# Altium PCB PCB1.PcbDoc
Units mil, origin at the board's own origin, x right, y up, seen from the top; angles counter-clockwise.
Board outline 6080 x 5395 mil, 2 copper layers (Top Layer, Bottom Layer); 29 components, 27 nets, 167 pads, 12 vias.
Unrouted connection lines stored in the file: 19.
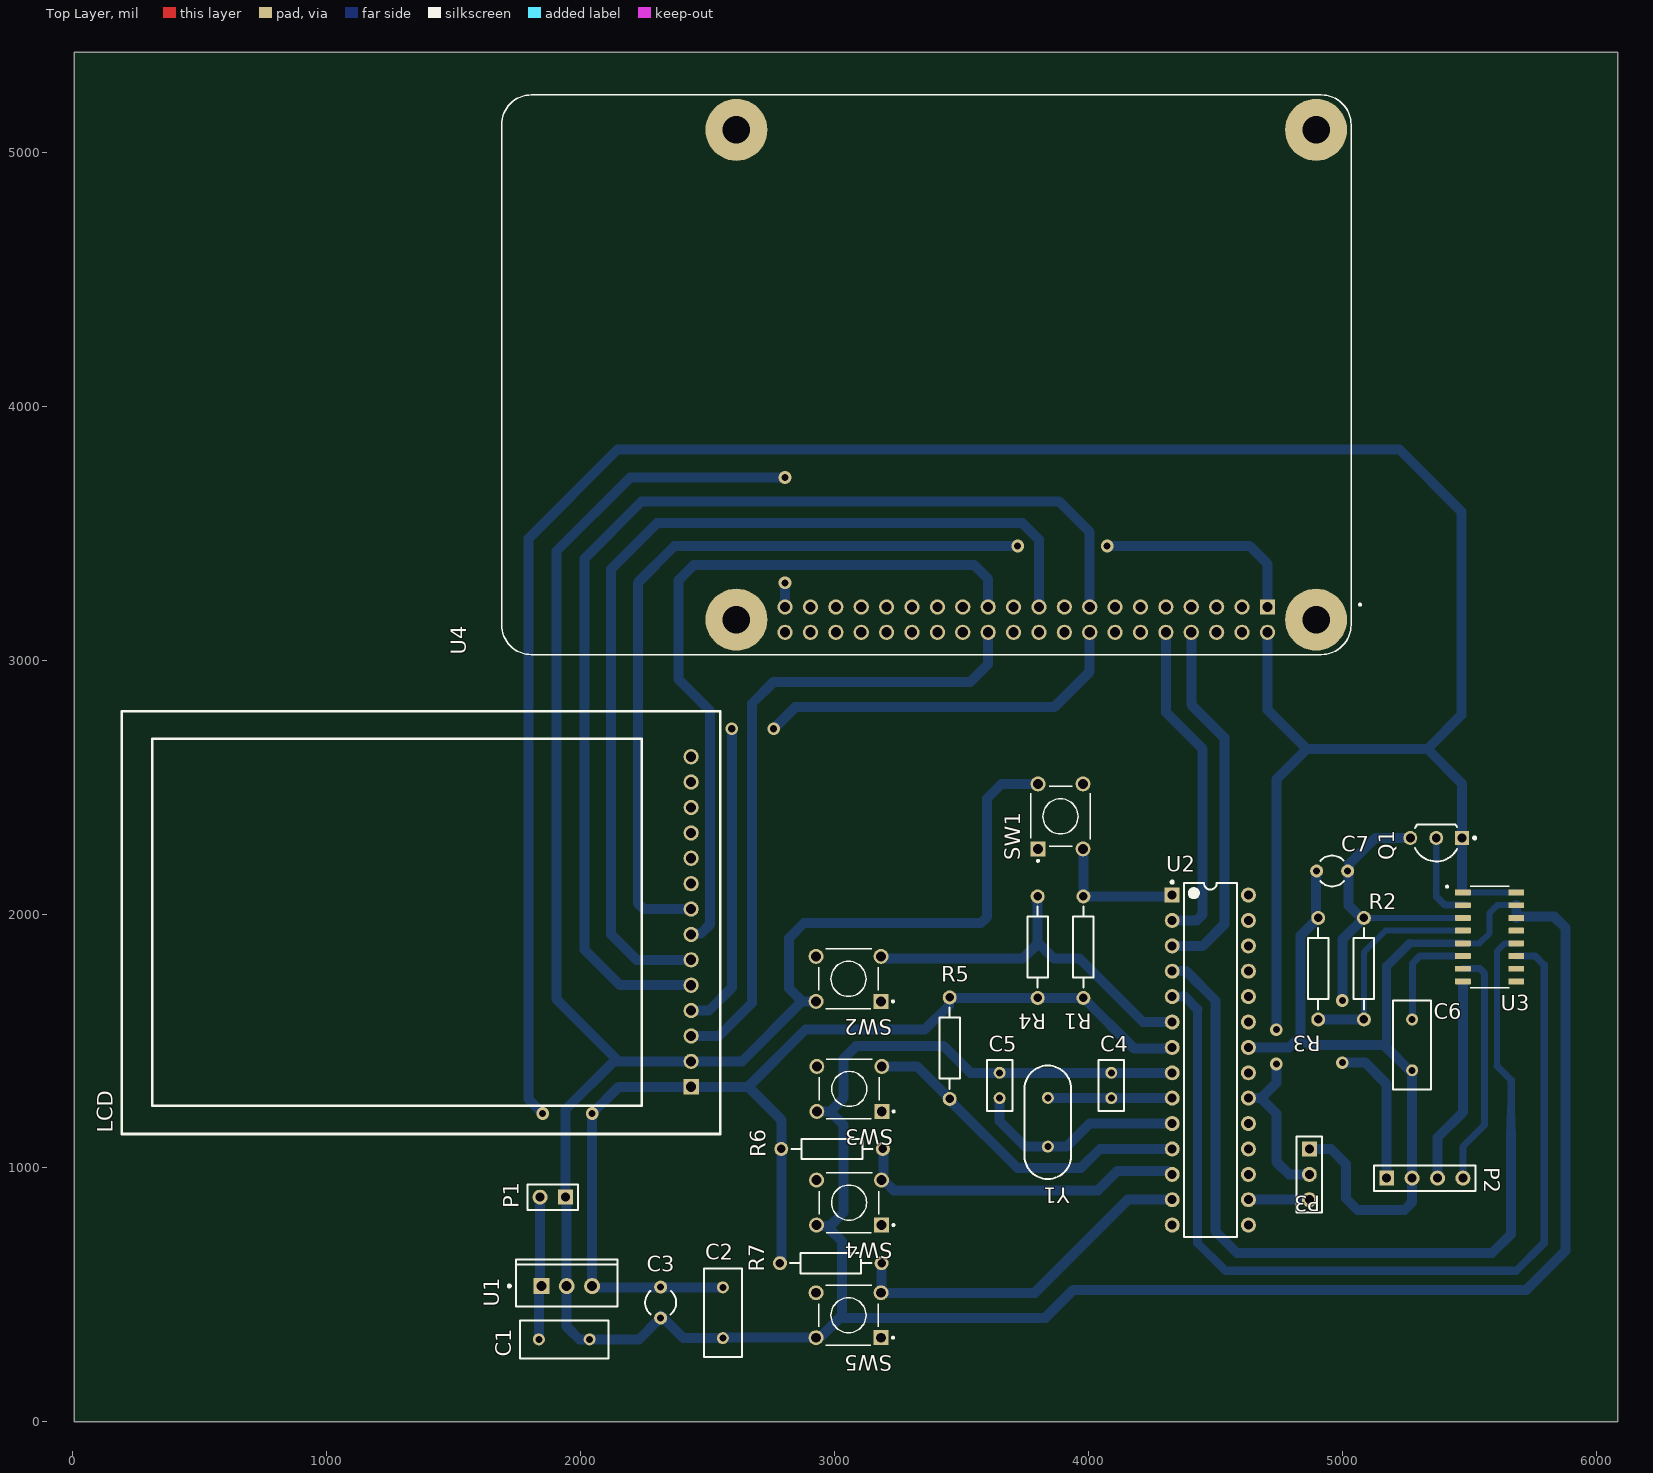
[diagram p0: Top Layer view]
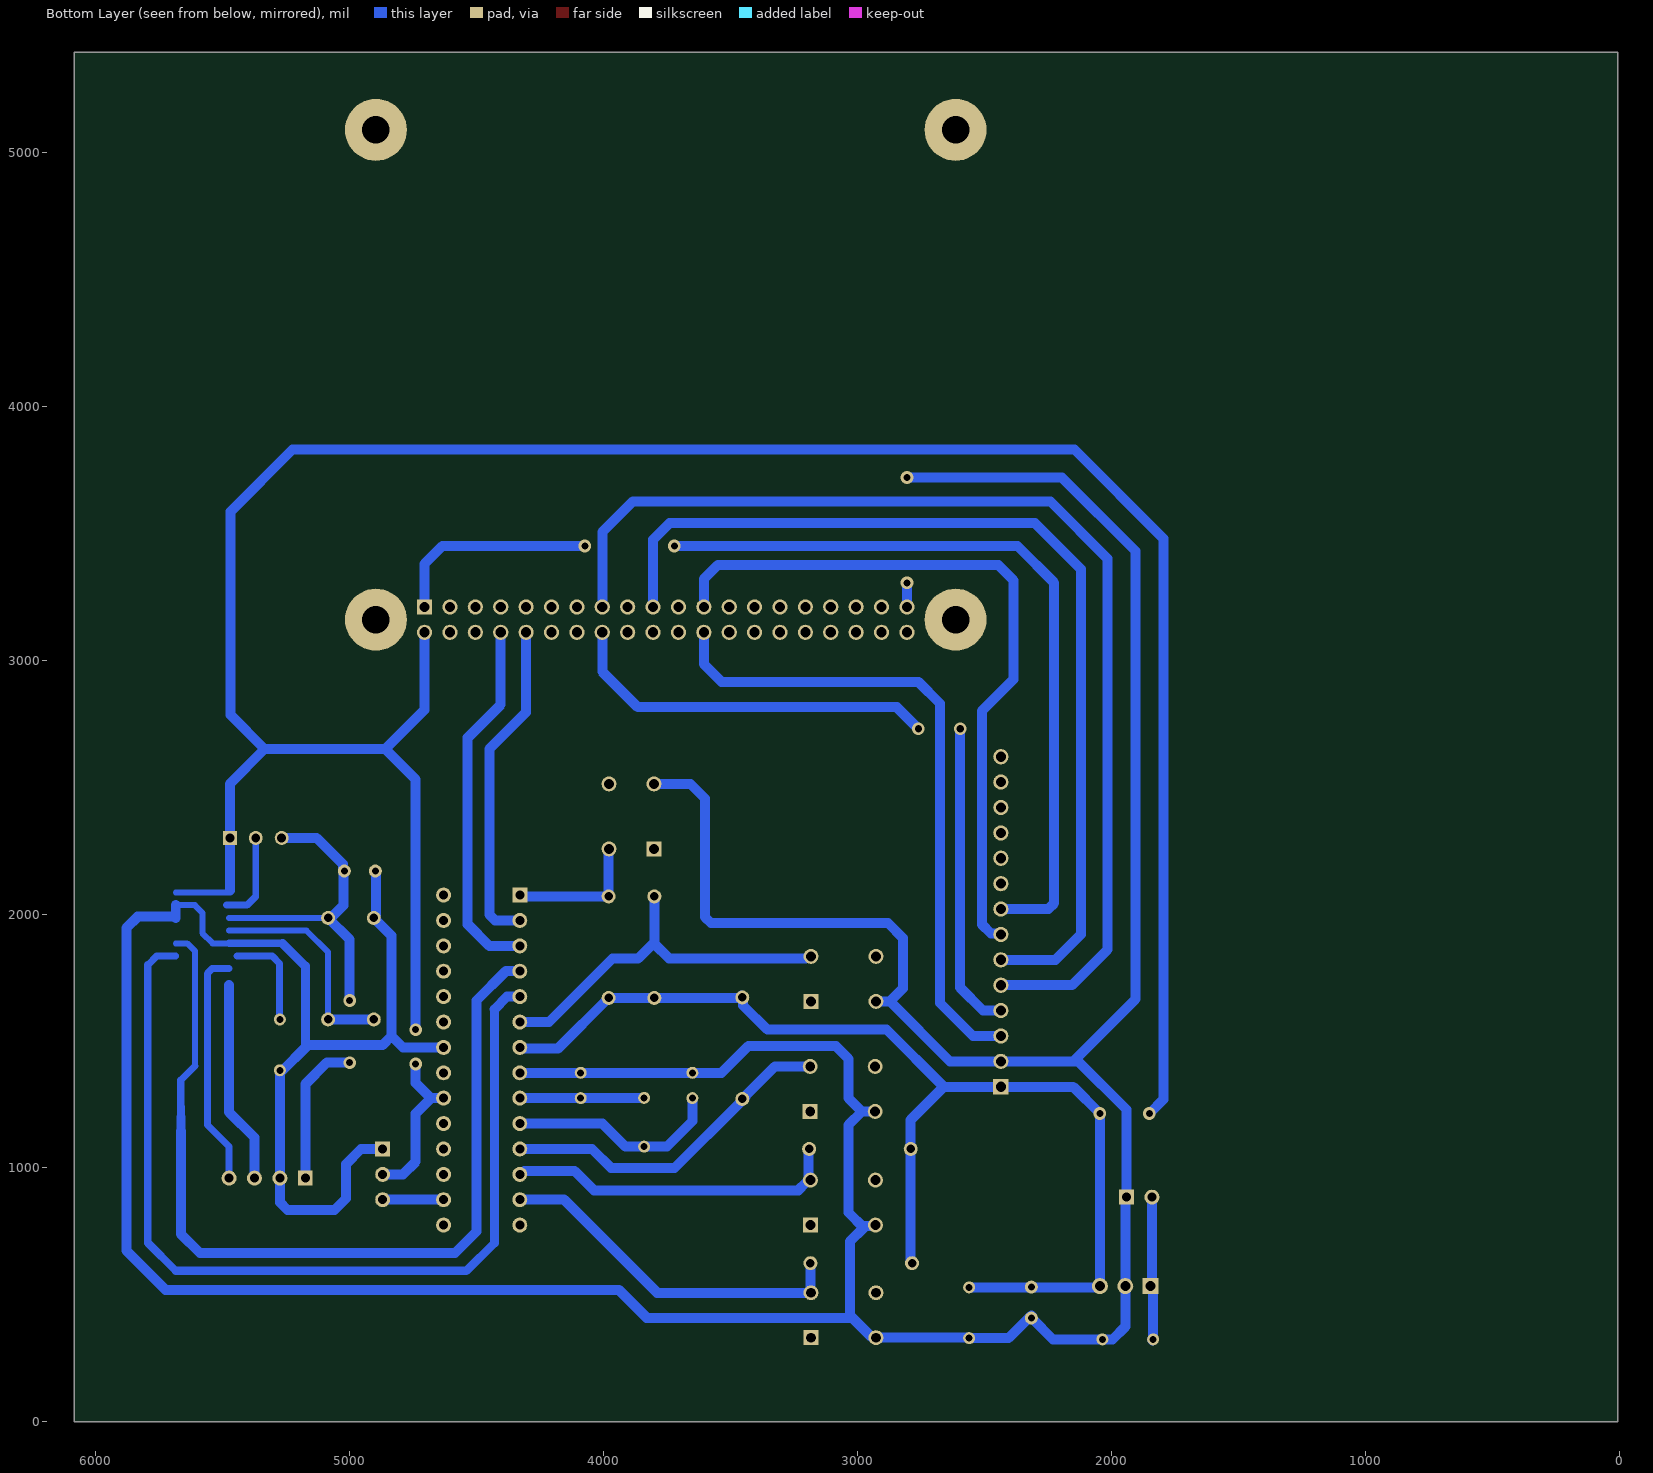
[diagram p1: Bottom Layer view, seen from below]

## Layer stack, top to bottom
Top Solder: solder mask 0.4, Solder Resist, Dk 3.5
Top Layer: signal copper 1.4
Dielectric 1: dielectric 12.6, FR-4, Dk 4.8
Bottom Layer: signal copper 1.4
Bottom Solder: solder mask 0.4, Solder Resist, Dk 3.5

## Board outline
5,0 6085,0 6085,5395 5,5395

## Design rules (kind name [scope] priority, off if disabled: settings)
Clearance [All] p1: gap=10 ignorepadtopadclearanceinfootprint=FALSE except(0: Arc-Hole Track-Hole SMDPad-Hole THPad-Hole Via-Hole Fill-Hole Poly-Hole Region-Hole Text-Hole)
PolygonConnect [All] p1: connectstyle=Relief reliefconductorwidth=10 reliefentries=4 polygonreliefangle="90 Angle" airgapwidth=10
RoutingVias [All] p1: holewidth=28 width=50 viastyle="Through Hole" minholewidth=28 minwidth=50 maxholewidth=28 maxwidth=50
SolderMaskExpansion [All] p1: expansion=4 istentingtop=FALSE
Width [All] p1: maxlimit=47.24 minlimit=23.62 preferedwidth=39.37 minimp=50.000000 maximp=50.000000 favimp=50.000000
30 further rules are at their usual default settings.

## Classes and differential pairs
component class Sheet2: DIS?

## Components (designator, comment, footprint, x,y, rotation, side; value= is the part's Value field where it differs from the comment)
C1 "Cap" RAD-0.2 1935,325 r180 top value=100nF
C2 "Cap" RAD-0.2 2560,430 r90 top value=100nF
C3 "Cap2" R38 2315,470 r0 top value=10uF
C4 "Cap" RAD-0.1 4090,1325 r90 top value=22pF
C5 "Cap" RAD-0.1 3650,1325 r90 top value=22pF
C6 "Cap" RAD-0.2 5275,1485 r90 top value=100nF
C7 "Cap2" R38 4960,2170 r270 top value=10uF
LCD "ILI9341 LCD TFT Display" ILI9341 2435,1970 r90 top
P1 "Header 2" HDR1X2 1940,885 r180 top
P2 "Load Cell" HDR1X4 5175,960 r0 top
P3 "Header 3" HDR1X3 4870,1075 r270 top
Q1 "2N4403" ONSC-TO-92-3-29-11_AM_BL 5370,2300 r180 top
R1 "" AXIAL-0.4 3980,1870 r270 top value=10K
R2 "" AXIAL-0.4 5085,1785 r90 top value=10K
R3 "" AXIAL-0.4 4905,1785 r270 top value=10K
R4 "" AXIAL-0.4 3800,1870 r270 top value=10K
R5 "" AXIAL-0.4 3453.58,1471.99 r90 top value=10K
R6 "" AXIAL-0.4 2990,1075 r180 top value=10K
R7 "" AXIAL-0.4 2985,625 r180 top value=10K
SW1 "1825910-6" SW_1825910-6-4 3890,2385 r90 top
SW2 "1825910-6" SW_1825910-6-4 3055,1745 r180 top
SW3 "1825910-6" SW_1825910-6-4 3057.95,1311.42 r180 top
SW4 "1825910-6" SW_1825910-6-4 3057.05,863.58 r180 top
SW5 "1825910-6" SW_1825910-6-4 3055,420 r180 top
U1 "LM7805CT" FAIR-TO-220-3 1945,535 r90 top
U2 "ATmega328-PU" 28P3 4480,1425 r0 top
U3 "HX711" SOP127P600X180-16N 5580,1910 r0 top
U4 "RASPBERRY_PI_3_MODEL_B+" MODULE_RASPBERRY_PI_3_MODEL_B+ 3361.3,4124.57 r180 top
Y1 "XTAL 16MHz" FOX-FOXSLF-2_V 3840,1180 r270 top

## Footprints (in the part's own frame and the unit in brackets; to place one, negate y for a bottom-side part, rotate by r counter-clockwise, add the part's x,y. Pads: shape width x height; smd on the part's side, far side on the other; paste and mask are expansions set on the pad)
28P3 [mm] "28-Pin Plastic Dual In-Line Package (PDIP)"
  rect 1.5x1.5 hole 0.9: 1(-3.81,16.51)
  round 1.5 hole 0.9: 2(-3.81,13.97) 3(-3.81,11.43) 4(-3.81,8.89) 5(-3.81,6.35) 6(-3.81,3.81) 7(-3.81,1.27) 8(-3.81,-1.27) 9(-3.81,-3.81) 10(-3.81,-6.35) 11(-3.81,-8.89) 12(-3.81,-11.43) 13(-3.81,-13.97) 14(-3.81,-16.51) 15(3.81,-16.51) 16(3.81,-13.97) 17(3.81,-11.43) 18(3.81,-8.89) 19(3.81,-6.35) 20(3.81,-3.81) 21(3.81,-1.27) 22(3.81,1.27) 23(3.81,3.81) 24(3.81,6.35) 25(3.81,8.89) 26(3.81,11.43) 27(3.81,13.97) 28(3.81,16.51)
  silkscreen extent -3.93,-17.7 2.65,17.93, body extent -3.6,-17.65 3.6,17.65, height 4.58
AXIAL-0.4 [mm] "Axial Device, Thru-Hole; 2 Leads; 0.4 in Pin Spacing"
  round 1.4 hole 0.85: 1(-5.08,0) 2(5.08,0)
  silkscreen extent -4.06,-1.02 4.06,1.02
FAIR-TO-220-3 [mm] "FM, 3-Leads, Body 10.2x4.7mm, Pitch 2.54mm"
  rect 1.6x1.6 hole 1: 1(0,2.54)
  round 1.6 hole 1: 2(0,0) 3(0,-2.54)
  silkscreen extent -2.04,-5.1 2.66,5.87, body extent -2.04,-5.1 2.66,5.1, height 18.95
FOX-FOXSLF-2_V [mm] "THD, 2-Leads, Body 11.35x4.65mm, Pitch 4.88mm"
  round 1.2 hole 0.7: 1(-2.44,0) 2(2.44,0)
  silkscreen extent -5.68,-2.33 5.68,2.33, body extent -5.67,-2.32 5.68,2.32, height 3.6
HDR1X2 [mm] "Connector; Header; 2 Position"
  rect 1.5x1.5 hole 0.9: 1(0,0)
  round 1.5 hole 0.9: 2(2.54,0)
  silkscreen extent -1.27,-1.27 3.81,1.27
HDR1X3 [mm] "Connector; Header; 3 Position"
  rect 1.5x1.5 hole 0.9: 1(0,0)
  round 1.5 hole 0.9: 2(2.54,0) 3(5.08,0)
  silkscreen extent -1.27,-1.27 6.35,1.27
HDR1X4 [mm] "Connector; Header; 4 Position"
  rect 1.5x1.5 hole 0.9: 1(0,0)
  round 1.5 hole 0.9: 2(2.54,0) 3(5.08,0) 4(7.62,0)
  silkscreen extent -1.27,-1.27 8.89,1.27
ILI9341 [mil]
  rect 60x60 hole 40: 0(-650,0)
  round 60 hole 40: 1(-550,0) 2(-450,0) 3(-350,0) 4(-250,0) 5(-150,0) 6(-50,0) 7(50,0) 8(150,0) 9(250,0) 10(350,0) 11(450,0) 12(550,0) 13(650,0)
  silkscreen extent -836,-115 830,2244
MODULE_RASPBERRY_PI_3_MODEL_B+ [mil]
  rect 60x60 hole 40: 1(-1343.7,914.57)
  round 60 hole 40: 2(-1343.7,1014.57) 3(-1243.7,914.57) 4(-1243.7,1014.57) 5(-1143.7,914.57) 6(-1143.7,1014.57) 7(-1043.7,914.57) 8(-1043.7,1014.57) 9(-943.7,914.57) 10(-943.7,1014.57) 11(-843.7,914.57) 12(-843.7,1014.57) 13(-743.7,914.57) 14(-743.7,1014.57) 15(-643.7,914.57) 16(-643.7,1014.57) 17(-543.7,914.57) 18(-543.7,1014.57) 19(-443.7,914.57) 20(-443.7,1014.57) 21(-343.7,914.57) 22(-343.7,1014.57) 23(-243.7,914.57) 24(-243.7,1014.57) 25(-143.7,914.57) 26(-143.7,1014.57) 27(-43.7,914.57) 28(-43.7,1014.57) 29(56.3,914.57) 30(56.3,1014.57) 31(156.3,914.57) 32(156.3,1014.57) 33(256.3,914.57) 34(256.3,1014.57) 35(356.3,914.57) 36(356.3,1014.57) 37(456.3,914.57) 38(456.3,1014.57) 39(556.3,914.57) 40(556.3,1014.57)
  round 244.09 hole 108.27: S1(-1535.43,964.57) S2(748.03,964.57) S3(748.03,-964.57) S4(-1535.43,-964.57)
  silkscreen extent -1713,-1102 1673,1102
ONSC-TO-92-3-29-11_AM_BL [mm] "TO, 3-Leads, Body Dia 4.7mm, Pitch 2.6mm"
  rect 1.4x1.4 hole 0.9: 1(-2.6,0)
  round 1.4 hole 0.9: 2(0,0) 3(2.6,0)
  silkscreen extent -3.98,-1.34 2.13,2.35, body extent -2.84,-1.34 2.84,2.35, height 5.33
R38 [mm] "Crystal, Thru-Hole; 2 Leads; Body 3.1 x 8.2 mm (Dia.xH)"
  round 1.3 hole 0.7: 1(0,1.55) 2(0,-1.55)
  silkscreen extent -1.55,-1.19 1.55,1.17
RAD-0.1 [mm] "Radial Cap, Thru-Hole; 2 Leads; 0.1 in Pin Spacing"
  round 1.2 hole 0.7: 1(-1.27,0) 2(1.27,0)
  silkscreen extent -2.54,-1.27 2.54,1.27
RAD-0.2 [mm] "Radial Cap, Thru-Hole; 2 Leads; 0.2 in Pin Spacing"
  round 1.2 hole 0.7: 1(-2.54,0) 2(2.54,0)
  silkscreen extent -4.44,-1.91 4.44,1.91
SOP127P600X180-16N [mm]
  rrect25% 1.58x0.59 smd: 1(-2.67,4.445) 2(-2.67,3.175) 3(-2.67,1.905) 4(-2.67,0.635) 5(-2.67,-0.635) 6(-2.67,-1.905) 7(-2.67,-3.175) 8(-2.67,-4.445) 9(2.67,-4.445) 10(2.67,-3.175) 11(2.67,-1.905) 12(2.67,-0.635) 13(2.67,0.635) 14(2.67,1.905) 15(2.67,3.175) 16(2.67,4.445)
  silkscreen extent -4.35,-5.06 1.95,5.13
SW_1825910-6-4 [mm]
  rect 1.498x1.498 hole 0.99: 1(-3.25,2.25)
  round 1.498 hole 0.99: 2(3.25,2.25) 3(-3.25,-2.25) 4(3.25,-2.25)
  silkscreen extent -4.54,-3 3,3

## Part data
C1 C2 C3 C4 C5 C6 C7: "Capacitor", Publisher="Altium Limited"
  C1 C2 C4 C5 C6: LatestRevisionDate=17-Jul-2002, LatestRevisionNote="Re-released for DXP Platform.", PackageDescription="Radial Cap, Thru-Hole; 2 Leads; 0.3 in Pin Spacing", PackageReference=RAD-0.3, Published=8-Jun-2000
  C3 C7: PackageDescription="Capacitor; 2 Leads", PackageReference=CAPR5-4X5, Published=23-Sep-2002
LCD: library part ILI9341
P1: "Header, 2-Pin", LatestRevisionDate=17-Jul-2002, LatestRevisionNote="Re-released for DXP Platform.", Publisher="Altium Limited"
P2: library part "Header 4", "Load Cell Connector, 4-Pin", LatestRevisionDate=17-Jul-2002, LatestRevisionNote="Re-released for DXP Platform.", Publisher="Altium Limited"
P3: "Header, 3-Pin", LatestRevisionDate=17-Jul-2002, LatestRevisionNote="Re-released for DXP Platform.", Publisher="Altium Limited"
Q1: library part CMP-1048-01491-1, "General Purpose Transistor, NPN Silicon, 3-Pin TO-92, Pb-Free, Ammo Box", Manufacturer="On Semiconductor", PartNumber=2N4401RLRPG, ComponentLink1Description="Manufacturer URL", ComponentLink1URL=http://www.onsemi.com/, ComponentLink2Description=Datasheet, ComponentLink2URL=http://www.onsemi.com/pub_link/Collateral/2N4401-D.PDF, ComponentLink3Description="Package Specification", ComponentLink3URL=http://www.onsemi.com/pub_link/Collateral/MAC97-D.PDF, DatasheetVersion="Rev. 4", fT Min (MHz)=250, IC Continuous (A)=0.6, Mounting Technology="Through Hole", PackageDescription="3-Pin Transistor Outline, Body 4.825 x 3.685 mm, Pitch 1.27 mm", PackageReference=TO-92-3-29-11_AM_BL, PackageVersion="Rev. AM", Packing="Ammo Box", Polarity=NPN, RoHS=TRUE
R1 R2 R3 R4 R5 R6 R7: library part Res2, "Resistor", LatestRevisionDate=17-Jul-2002, LatestRevisionNote="Re-released for DXP Platform.", PackageDescription="Axial Device, Thru-Hole; 2 Leads; 0.4 in Pin Spacing", PackageReference=AXIAL-0.4, Published=8-Jun-2000, Publisher="Altium Limited"
SW1 SW2 SW3 SW4 SW5: "Switch Tactile OFF (ON) SPST Round Button PC Pins 0.05A 24VDC 100000Cycles 1.57N Thru-Hole Loose", Package=None, Availability=Unavailable, MP=1825910-6, Price=None
U1: library part CMP-2000-04938-1, "Positive Voltage Regulator, 5 V, 1 A, -40 to 125 degC, 3-Pin TO-220, RoHS, Tube", Manufacturer=FairchildSemiconductor, Maximum Input Voltage=35V, Maximum Output Current=2.2(Typ)A, Maximum Quiescent Current=8mA, Operating Temperature=-40to125degC, Output Voltage=5V, Package=3TO-220AB, Package Description="3-Pin Through Hole Device, Body 10 x 4.5 mm, Pitch 2.54 mm", Package Reference=TO-220, Typical Dropout Voltage @ Current=2@1AV, Accuracy=±4%, Category=LinearRegulator, Datasheet URL=https://datasheet.ciiva.com/26904/lm7805ct-26904988.pdf, Datasheet Version=Aug-12, Line Regulation=100mV, Load Regulation=100mV, Manufacturer URL=https://www.fairchildsemi.com/, Mounting=ThroughHole, Number of Outputs=1, Output Type=Fixed, Package URL=https://www.fairchildsemi.com/package-drawings/TO/TO220B03.pdf, Packaging=Rail/Tube, Polarity=Positive, Rad Hard=No, Type=Linear
U2: library part CMP-0095-00015-2, "8-bit AVR Microcontroller, 32KB Flash, 1KB EEPROM, 2KB SRAM, 28-pin PDIP, Industrial Grade (-40°C to 85°C)", ComponentLink1Description="Manufacturer URL", ComponentLink1URL=http://www.atmel.com/, ComponentLink2Description="ATmega48A/48PA/88A/88PA/168A/168PA/328/328P Datasheet", ComponentLink2URL=http://www.atmel.com/dyn/resources/prod_documents/8271.pdf, ComponentLink3Description="ATmega48A/48PA/88A/88PA/168A/168PA/328/328P Summary", ComponentLink3URL=http://www.atmel.com/dyn/resources/prod_documents/8271S.pdf, DatasheetVersion="revD, May-2011", PackageDescription="28-lead (0.300\"/7.62mm Wide) Plastic Dual Inline Package (PDIP)", PackageReference=28P3, PackageVersion="revB, Sep-2001", RevisionNote="DatasheetVersion updated. URLs added."
U3: Package=None, Availability=Unavailable, MP=HX711, Price=None
U4: "BCM2835 Raspberry Pi Model B+ - ARM11, VideoCore MPU Embedded Evaluation Board", Package=None, Availability=Unavailable, MP=RASPBERRY_PI_3_MODEL_B+, Price=None
Y1: library part CMP-1749-00004-1, "Resistance Weld Thru-Hole Crystal, 12 MHz, +/-30 ppm, -20 to 70 degC, 2-Pin THD, RoHS, Bulk", Case\Package=TO-251-3, Input Capacitance="350 pF", Max Operating Temperature="150 degC", Max Power Dissipation="2.5 W", Min Operating Temperature="-55 degC", Package Quantity=70, ComponentLink1Description="Manufacturer URL", ComponentLink1URL=http://www.foxonline.com/, ComponentLink2Description=Datasheet, ComponentLink2URL=http://www.foxonline.com/pdfs/hc49slf.pdf, DatasheetVersion=Mar-15, Elements=1, Height="6.1 mm", Length="6.6 mm", Mount="Through Hole", PackageDescription="2-Pin Through Hole Device, Body 11.35 x 4.65 mm, Pitch 4.88 mm", PackageReference=FOXSLF-2, Packaging=Rail/Tube, Pins=3, Radiation Hardening=No, Rds On Max="115 mohm", REACH SVHC="No SVHC", RoHSCompliant=true, Typical Rise Time="90 ns", Width="2.3 mm"

## Via types
v1: diameter 50, hole 28, Top Layer to Bottom Layer, 12 vias

## Nets (pads, with @x,y where several pads share a name; then routed paths per layer and width w, separated by ;. In a path a pad name is that pad's centre, name@x,y a point inside that pad or via, vN(x,y) a via of type N, cw(c..) or ccw(c..) an arc to the next point about the centre after c; other vN are vias at no path point)
+3V3: LCD.7 U4.1 | length 3867.8
  Bottom Layer w39.37: LCD.7 2248.06,2020 2225,2043.06 2225,3305 2370,3450 v1(3721.13,3450) ; v1(4073.85,3450) 4635,3450 4705,3380 U4.1
+5: C2.2 C3.1 LCD.0 P3.2 Q1.1 R1.2 R4.2 R5.2 R6.2 R7.2 U1.3 U2.7 U2.20 U3.1 U3.16 U4.2 | length 15322.9
  Bottom Layer w23.62: 5474.88,2085 5685.12,2085
  Bottom Layer w39.37: v1(1850,1215) 1795,1270 1795,3480 2145,3830 5225,3830 5470,3585 5470,2785 5335,2650 ; C2.2 2050,530 U1.3 v1(2045,1215) 2150,1320 LCD.0 2660,1320 ; R7.2@2781.99,621.99 R7.2 2785,629.26 2790,634.26 R6.2 2790,1190 2660,1320 ; R5.2 3450.57,1668.97 3450.57,1640.57 3355,1545 2885,1545 2660,1320 ; R5.2@3455.82,1678.49 R5.2@3455.82,1679.26 ; R5.2@3461.14,1670 R4.2 R1.2 4180,1470 4311.08,1470 4312.31,1471.23 4326.23,1471.23 U2.7 ; U2.20 4680,1275 ; U4.2 4705,2805 4860,2650 ; v1(4740,1410) 4740,1335 4680,1275 ; v1@4740,1556.98 4740,2530 4860,2650 ; P3.2 4790,975 4740,1025 4740,1215 4680,1275 ; 5472.36,2093.07 Q1.1 5472.36,2512.64 5335,2650 ; 4860,2650 5335,2650
  other v1: 4740,1545
BTN1: R4.1 SW2.3 U2.6 | length 1489.6
  Bottom Layer w39.37: 3800,1883.58 3741.42,1825 3205.4,1825 3200.57,1829.83 SW2.3@3192.01,1829.83 ; R4.1 3800,1888.58 3863.58,1825 3965,1825 4215,1575 U2.6 ; SW2.3@3188.7,1826.52 SW2.3@3192.01,1829.83 ; SW2.3@3188.7,1826.52 SW2.3@3192.01,1829.83 ; SW2.3@3188.7,1826.52 SW2.3@3192.01,1829.83
BTN2: R5.1 SW3.3 U2.11 | length 2149.7
  Bottom Layer w39.37: SW3.3 3325.57,1400 R5.1 ; U2.11 4045,1075 3970,1000 3720,1000 ; R5.1@3440,1280 3720,1000 ; R5.1@3440,1280 3720,1000 ; R5.1@3440,1280 3467.5,1252.5 3720,1000
BTN3: R6.1 SW4.3 U2.12 | length 1566.1
  Bottom Layer w39.37: U2.12 4324.67,975 4311.09,988.58 4113.58,988.58 4037.31,912.31 3232.81,912.31 3202.76,942.36 3200.11,942.36 SW4.3@3192.95,949.52 ; SW4.3@3192.95,949.52 R6.1@3192.95,1075 ; SW4.3@3192.95,949.52 R6.1@3192.95,1075 ; SW4.3@3192.95,949.52 R6.1@3192.95,1075
BTN4: R7.1 SW5.3 U2.13 | length 1416.1
  Bottom Layer w39.37: R7.1 3185,510.63 SW5.3 3788.58,508.58 4155,875 U2.13
CLK: LCD.6 U4.23 | length 2876
  Bottom Layer w39.37: LCD.6 2438.95,1923.95 2473.95,1923.95 2510,1960 2510,2800 2385,2925 2385,3315 2445,3375 3550,3375 3605,3320 U4.23
CS: LCD.2 U4.24 | length 2593.1
  Bottom Layer w39.37: LCD.2 2545,1520 2675,1650 2675,2830 2760,2915 3535,2915 3605,2985 U4.24
DOUT: U2.4 U3.12 | length 3584.2
  Bottom Layer w23.62: 5610,1401.16 5610,1855 5640,1885 5685.12,1885
  Bottom Layer w27.56: 5610,1401.16 5665,1346.16
  Bottom Layer w29.53: 5665,1240 5665,1346.16
  Bottom Layer w31.5: 5665,1200 5665,1240
  Bottom Layer w35.43: 5665,1145 5665,1200
  Bottom Layer w39.37: U2.4 4385,1775 4500,1660 4500,750 4585,665 5590,665 5665,740 5665,1145
E+: C7.1 P2.1 Q1.3 R2.2 U3.3 | length 1860.9
  Bottom Layer w23.62: R2.2@5070,1985 5077.73,1985 R2.2 5474.88,1985
  Bottom Layer w39.37: v1(5000,1415) 5090,1415 5175,1330 P2.1 ; v1@5000,1675 5000,1900 R2.2 ; Q1.3 5130,2300 5026.93,2196.93 5026.93,2179.1 5023.28,2175.46 5023.28,2171.72 5025,2170 5023.28,2168.28 5023.28,2164.54 5025,2162.83 5025,2034.26 5066.39,1992.87 5072.86,1992.87 R2.2@5077.73,1988.01 ; R2.2@5077.73,1985 R2.2@5077.73,1988.01 ; R2.2@5077.73,1985 R2.2@5077.73,1988.01 ; R2.2@5077.73,1985 R2.2@5077.73,1988.01
  other v1: 5000,1660
GND: C1.1 C2.1 C3.2 C4.2 C5.2 C6.1 C7.2 LCD.1 P1.1 P2.2 P3.1 R3.1 SW1.2 SW2.2 SW3.2 SW4.2 SW5.2 U1.2 U2.8 U2.22 U3.5 U3.14 U3.15 U4.39 | length 18786.3
  Bottom Layer w23.62: R3.1@4899.86,1979.86 4901.99,1981.99 R3.1 ; 5474.88,1885 5540,1885 5580,1925 5580,2005 5610,2035 5685.12,2035
  Bottom Layer w29.53: 5265,1885 5474.88,1885
  Bottom Layer w35.43: 5175,1473.79 5175,1795 5265,1885
  Bottom Layer w39.37: v1@2802.12,3720 2195,3720 1905,3430 1905,1665 2150,1420 ; U4.39 v1(2805,3305) ; SW2.2 2871.42,1656.42 ; SW4.2 2932.85,771.25 2968.75,771.25 2975,765 ; SW3.2 2982.17,1222.83 ; 3020,410 3830,410 3940,520 5725,520 5880,675 5880,1945 5835,1990 5696.54,1990 ; C5.2 3535,1375 3430,1480 3085,1480 3035,1430 3035,1275 2982.83,1222.83 2982.17,1222.83 ; C5.2@3662.13,1375 C4.2 U2.8 ; SW1.2 3657.95,2512.95 3600,2455 3600,1988.06 3576.94,1965 2880,1965 2820,1905 2820,1707.84 2871.42,1656.42 ; U2.22@4620,1475 U2.22 4790,1475 4835,1520 ; P3.1 4955,1075 5015,1015 5015,880 5060,835 5245,835 5275,865 P2.2 C6.1 5273.49,1386.51 5262.29,1386.51 5175,1473.79 5165,1483.79 4871.21,1483.79 4835,1520 ; R3.1@4897.13,1977.13 4835,1915 4835,1520 ; C7.2@4897.13,2165 4897.13,1997.14 4901.99,1992.27 R3.1@4901.99,1981.99 ; 5685.12,1985 5685.12,2035 ; 2150,1420 LCD.1 2635,1420 2871.42,1656.42 ; 2150,1420 2130,1420 1940,1230 P1.1 1945,880 U1.2 1945,375 1995,325 C1.1 2230,325 2312.74,407.74 2312.74,416.72 2315,418.98 2403.98,330 C2.1 2561.42,331.42 SW5.2 2930.8,335.17 2945.17,335.17 3030,420 3030,710 2975,765 ; 2975,765 3035,825 3035,1170 2982.17,1222.83
  other v1: 2805,3720
MOSI: LCD.5 U4.19 | length 3847.9
  Bottom Layer w39.37: LCD.5 2220,1820 2120,1920 2120,3360 2300,3540 3740,3540 3805,3475 U4.19
NetC4_1: C4.1 U2.9 Y1.1 | length 485.4
  Bottom Layer w39.37: Y1.1 3841.06,1275 C4.1 ; C4.1@4095,1275 U2.9
NetC5_1: C5.1 U2.10 Y1.2 | length 849.6
  Bottom Layer w39.37: C5.1 3650,1185 3750,1085 3838.94,1085 Y1.2 3913.94,1083.94 4005,1175 U2.10
NetC6_2: C6.2 U3.6 | length 402.4
  Bottom Layer w27.56: C6.2@5275.75,1585.75 5275.75,1805.75 5305,1835 5443.89,1835
  Bottom Layer w39.37: C6.2 5275.75,1585.75 C6.2@5276.51,1586.51
NetP2_3: P2.3 U3.8 | length 801.4
  Bottom Layer w39.37: P2.3 5375,1120 5474.88,1219.88 5474.88,1720
NetP2_4: P2.4 U3.7 | length 934.7
  Bottom Layer w27.56: 5474.88,1785 5541.94,1785 5560,1766.94 5560,1170 5475,1085 P2.4
NetP3_3: P3.3 U2.16 | length 240
  Bottom Layer w39.37: U2.16 P3.3
NetQ1_2: Q1.2 U3.2 | length 359.5
  Bottom Layer w27.56: Q1.2 5370,2070 5405,2035 5474.88,2035 5485,2035
PD_SCK: U2.5 U3.11 | length 3716.2
  Bottom Layer w27.56: 5685.12,1835 5760,1835 5795,1800
  Bottom Layer w29.53: 5795,705 5795,1800
  Bottom Layer w31.5: 5685,595 5795,705
  Bottom Layer w33.46: 4430,705 4540,595 5685,595
  Bottom Layer w35.43: 4430,705 4430,1625
  Bottom Layer w37.4: 4380,1675 4430,1625
  Bottom Layer w39.37: U2.5 4380,1675
RST: R1.1 SW1.3 U2.1 | length 565.5
  Bottom Layer w39.37: SW1.3@3976.08,2254.55 SW1.3@3980,2250.63 ; U2.1 4325,2070 R1.1 SW1.3@3980,2250.63 ; SW1.3@3973.58,2257.05 SW1.3@3980,2250.63 ; SW1.3@3973.58,2257.05 SW1.3@3980,2250.63 ; SW1.3@3973.58,2257.05 SW1.3@3980,2250.63
RxD: U2.2 U4.10 | length 1301.6
  Bottom Layer w39.37: U4.10 4305,2795 4450,2650 4450,1998.06 4426.94,1975 U2.2
TFT_RS: LCD.4 U4.15 | length 4445.9
  Bottom Layer w39.37: LCD.4 2155,1720 2015,1860 2015,3400 2240,3625 3885,3625 4005,3505 U4.15
TFT_RST: LCD.3 U4.16 | length 2710.5
  Bottom Layer w39.37: LCD.3 2505,1620 2595,1710 v1(2595,2730) ; v1(2760,2730) 2845,2815 3865,2815 4005,2955 U4.16
TxD: U2.3 U4.8 | length 1444.1
  Bottom Layer w39.37: U2.3 4450,1875 4535,1960 4535,2695 4405,2825 U4.8
VCC: C1.2 P1.2 U1.1 | length 585.9
  Bottom Layer w39.37: P1.2 1840,540 U1.1 1835,525 1835,332.13 C1.2@1838.49,328.64 ; C1.2@1838.49,321.36 C1.2@1838.49,328.64 ; C1.2@1838.49,321.36 C1.2@1838.49,328.64 ; C1.2@1838.49,321.36 C1.2@1838.49,328.64
VFB: R2.1 R3.2 U3.4 | length 855.1
  Bottom Layer w23.62: R2.1 5085,1850 5170,1935 5474.88,1935
  Bottom Layer w39.37: R3.2 R2.1@5070,1585
pads on no net: LCD.8 LCD.9 LCD.10 LCD.11 LCD.12 LCD.13 SW1.1 SW1.4 SW2.1 SW2.4 SW3.1 SW3.4 SW4.1 SW4.4 SW5.1 SW5.4 U2.14 U2.15 U2.17 U2.18 U2.19 U2.21 U2.23 U2.24 U2.25 U2.26 U2.27 U2.28 U3.9 U3.10 U3.13 U4.3 U4.4 U4.5 U4.6 U4.7 U4.9 U4.11 U4.12 U4.13 U4.14 U4.17 U4.18 U4.20 U4.21 U4.22 U4.25 U4.26 U4.27 U4.28 U4.29 U4.30 U4.31 U4.32 U4.33 U4.34 U4.35 U4.36 U4.37 U4.38 U4.40 U4.S1 U4.S2 U4.S3 U4.S4